# EAGLE board interfon (EAGLE 9.6.2)
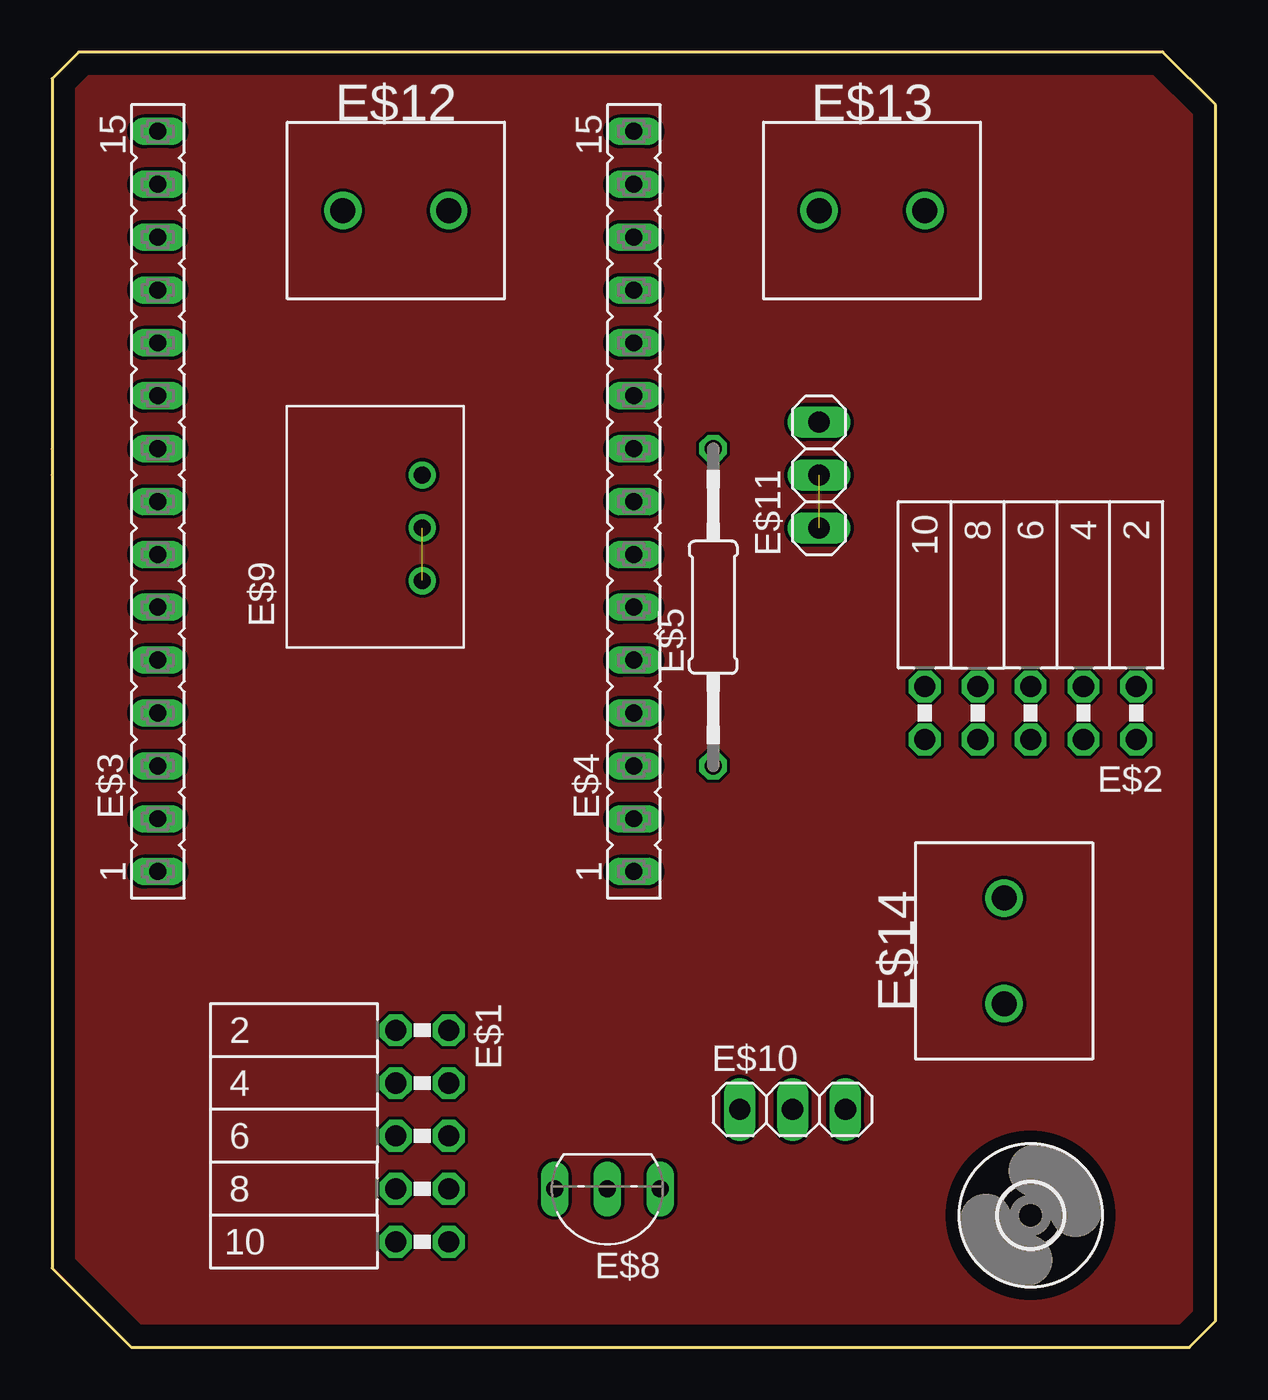
[diagram p0: board, top side]
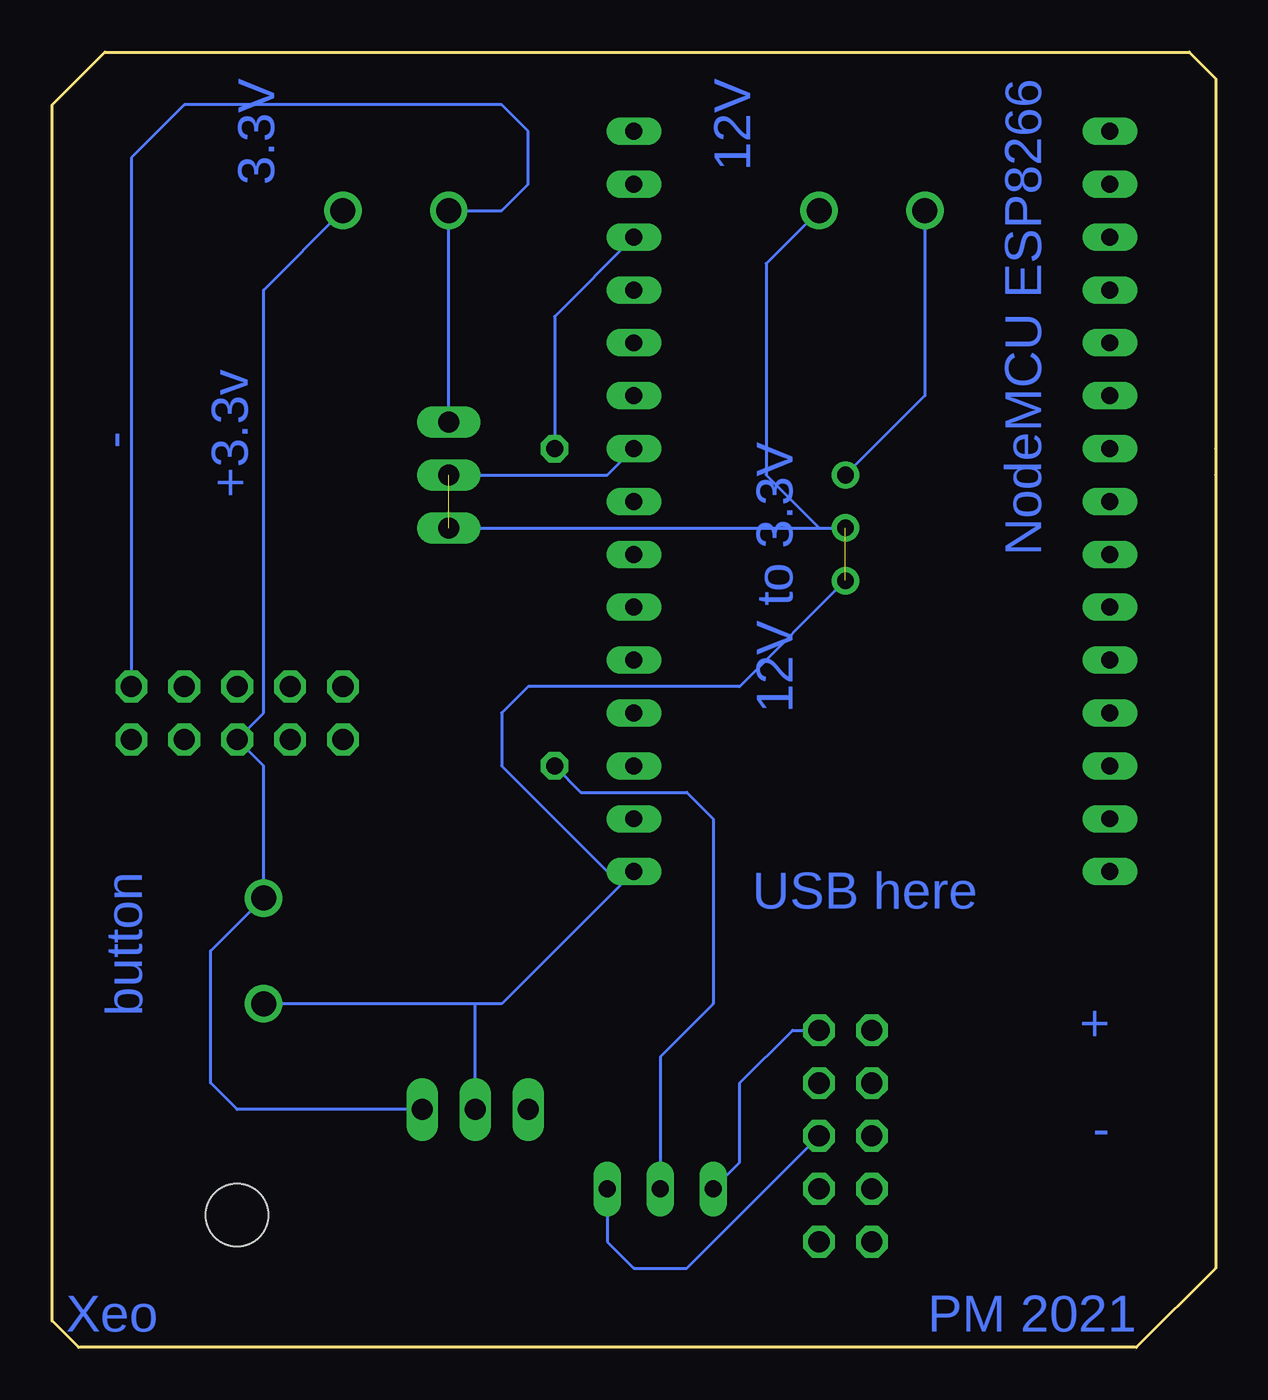
[diagram p1: board, bottom side, seen from below]

Size 55.88 x 62.23 mm. Coordinates in mm from the lower left corner, seen from the top.
Outline: 0,60.96 0,43.18 0,41.91 0,3.81 3.81,0 54.61,0 55.88,1.27 55.88,59.69 53.34,62.23 1.27,62.23 0,60.96
Copper layers (1*16): Top 0.035mm / dielectric 1.5mm / Bottom 0.035mm
Design rules "default": minimum track width 6mil, minimum drill 0.35mm, track to track 6mil, track to pad 6mil, pad to pad 6mil, via to via 6mil, smd to smd 6mil, copper to edge 40mil, drill to drill 6mil, minimum pad ring 10mil, minimum via ring 8mil, stop-mask expansion 4mil, vias tented up to drill 0mil, thermal gap 10mil

## Footprints (pad centres in the part's own frame; a part is rotated, then mirrored left to right if it is on the bottom)
FE05-2W = drill 1.016 octagon: 1 -5.08,1.27; 2 -5.08,-1.27; 3 -2.54,1.27; 4 -2.54,-1.27; 5 0,1.27; 6 0,-1.27; 7 2.54,1.27; 8 2.54,-1.27; 9 5.08,1.27; 10 5.08,-1.27
FE15 = drill 0.813 long: 1 -17.78,0; 2 -15.24,0; 3 -12.7,0; 4 -10.16,0; 5 -7.62,0; 6 -5.08,0; 7 -2.54,0; 8 0,0; 9 2.54,0; 10 5.08,0; 11 7.62,0; 12 10.16,0; 13 12.7,0; 14 15.24,0; 15 17.78,0
0207/15 = drill 0.813 octagon: 1 -7.62,0; 2 7.62,0
3,0 = hole 3: 0,0
TO92-CBE = drill 0.813 long: B 0,0; C -2.54,0; E 2.54,0
DC-DC_CONVERTER_78XX = drill 0.8: GND 0,0; VIN -2.54,0; VOUT 2.54,0
1X03 = drill 1.016 long: 1 -2.54,0; 2 0,0; 3 2.54,0
TERMBLK_508-2N = drill 1.2: 1 0,0; 2 5.08,0

## Placement (x,y rotation side)
E$1  [FE05-2W]  17.78,10.16 270 top
E$2  [FE05-2W]  46.99,30.48 180 top
E$3  [FE15]  5.08,40.64 90 top
E$4  [FE15]  27.94,40.64 90 top
E$5  [0207/15]  31.75,35.56 90 top
E$6  [3,0]  46.99,6.35 0 top
E$8  [TO92-CBE]  26.67,7.62 180 top
E$9  [DC-DC_CONVERTER_78XX]  17.78,39.37 90 top
E$10  [1X03]  35.56,11.43 0 top
E$11  [1X03]  36.83,41.91 90 top
E$12  [TERMBLK_508-2N]  19.05,54.61 180 top
E$13  [TERMBLK_508-2N]  41.91,54.61 180 top
E$14  [TERMBLK_508-2N]  45.72,21.59 270 top

## Library data of the parts
E$1-E$4 = con-lsta
E$5 = rcl
E$6 = holes
E$8 = transistor
E$9 = SparkFun-IC-Power
E$10-E$14 = Connector

## Nets
S$1: E$9.VOUT E$12.2
S$3: E$4.13 E$5.2
S$4: E$5.1 E$8.B
S$6: E$2.2 E$11.3 E$13.2
S$7: E$2.5 E$10.3 E$13.1 E$14.1
S$8: E$1.1 E$8.E
S$9: E$1.5 E$8.C
S$10: E$4.1 E$4.9 E$9.GND E$9.VIN E$10.2 E$11.1 E$11.2 E$12.1 E$14.2

## Tracks (layer width: path | path; a pad name or v marks a point on that pad's centre or on a via)
MARGINE
  pour Top: 0,59.69 0,60.96 1.27,62.23 53.34,62.23 54.61,60.96 55.88,59.69 55.88,2.54 55.88,1.27 54.61,0 3.81,0 1.27,2.54 0,3.81
S$1
  Bottom 0.152: E$9.VOUT 13.97,45.72 E$12.2
S$3
  Bottom 0.152: E$4.13 31.75,49.53 E$5.2
S$4
  Bottom 0.152: E$5.1 30.48,26.67 25.4,26.67 24.13,25.4 24.13,16.51 26.67,13.97 E$8.B
S$6
  Bottom 0.152: E$11.3 E$13.2 34.29,54.61 33.02,55.88 33.02,58.42 34.29,59.69 49.53,59.69 52.07,57.15 E$2.2
S$7
  Bottom 0.152: E$10.3 46.99,11.43 48.26,12.7 48.26,19.05 E$14.1 45.72,27.94 E$2.5 45.72,30.48 45.72,50.8 E$13.1
S$8
  Bottom 0.152: E$8.E 22.86,8.89 22.86,12.7 20.32,15.24 E$1.1
S$9
  Bottom 0.152: E$8.C 29.21,5.08 27.94,3.81 25.4,3.81 E$1.5
S$10  (2 unrouted)
  Bottom 0.152: E$4.1 28.58,22.22 | 28.58,22.22 34.29,16.51 35.56,16.51 | 35.56,16.51 E$14.2 | E$10.2 35.56,16.51 | E$12.1 21.59,52.07 21.59,41.91 19.05,39.37 E$9.GND E$11.1 | E$4.9 29.21,41.91 E$11.2 | E$9.VIN 22.86,31.75 33.02,31.75 34.29,30.48 34.29,27.94 28.58,22.22

## Text on the board
Bottom: NodeMCU ESP8266 | 12V | 3.3V | +3.3v | - | 12V to 3.3V | USB here | button | + | - | PM 2021 | Xeo